# Altium PCB PCB_ws2812_controlBoard_2021-06-14.pcbdoc
Units mm, origin at the board's own origin, x right, y up, seen from the top; angles counter-clockwise.
Board outline 41 x 27 mm, 2 copper layers (Top Layer, Bottom Layer); 14 components, 17 nets, 61 pads, 7 vias.
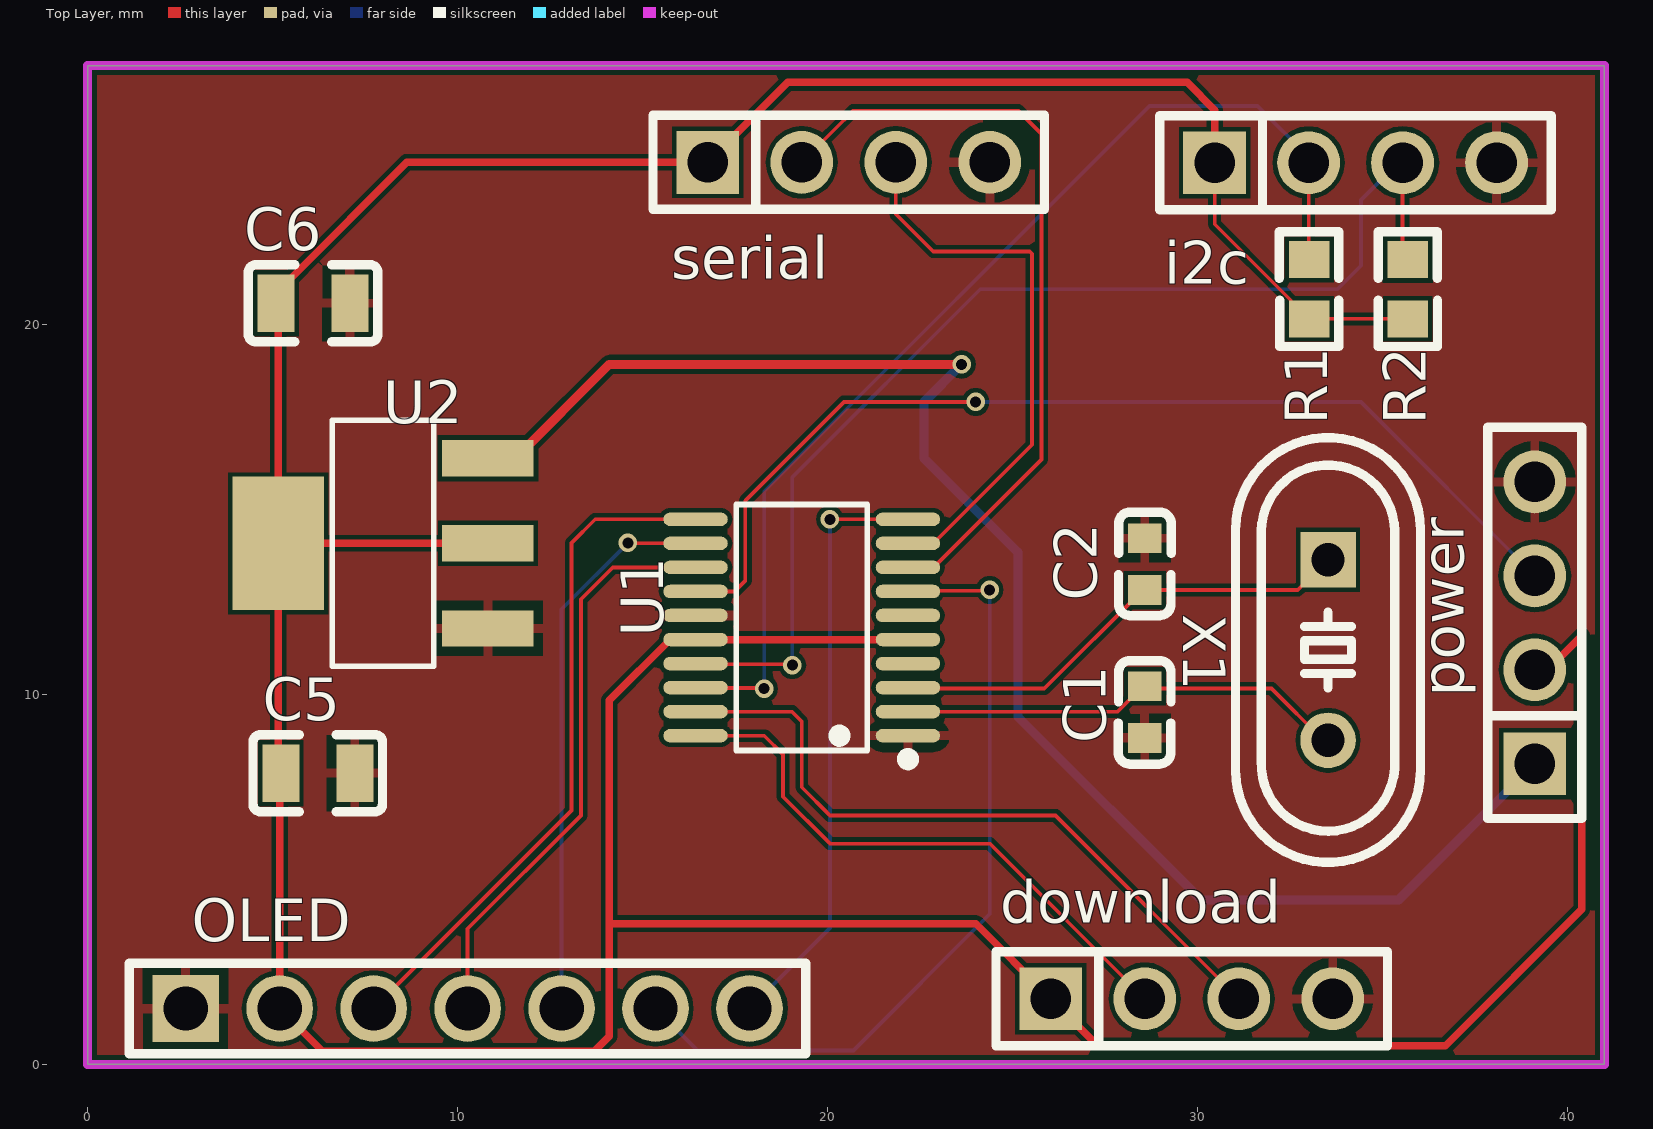
[diagram p0: Top Layer view]
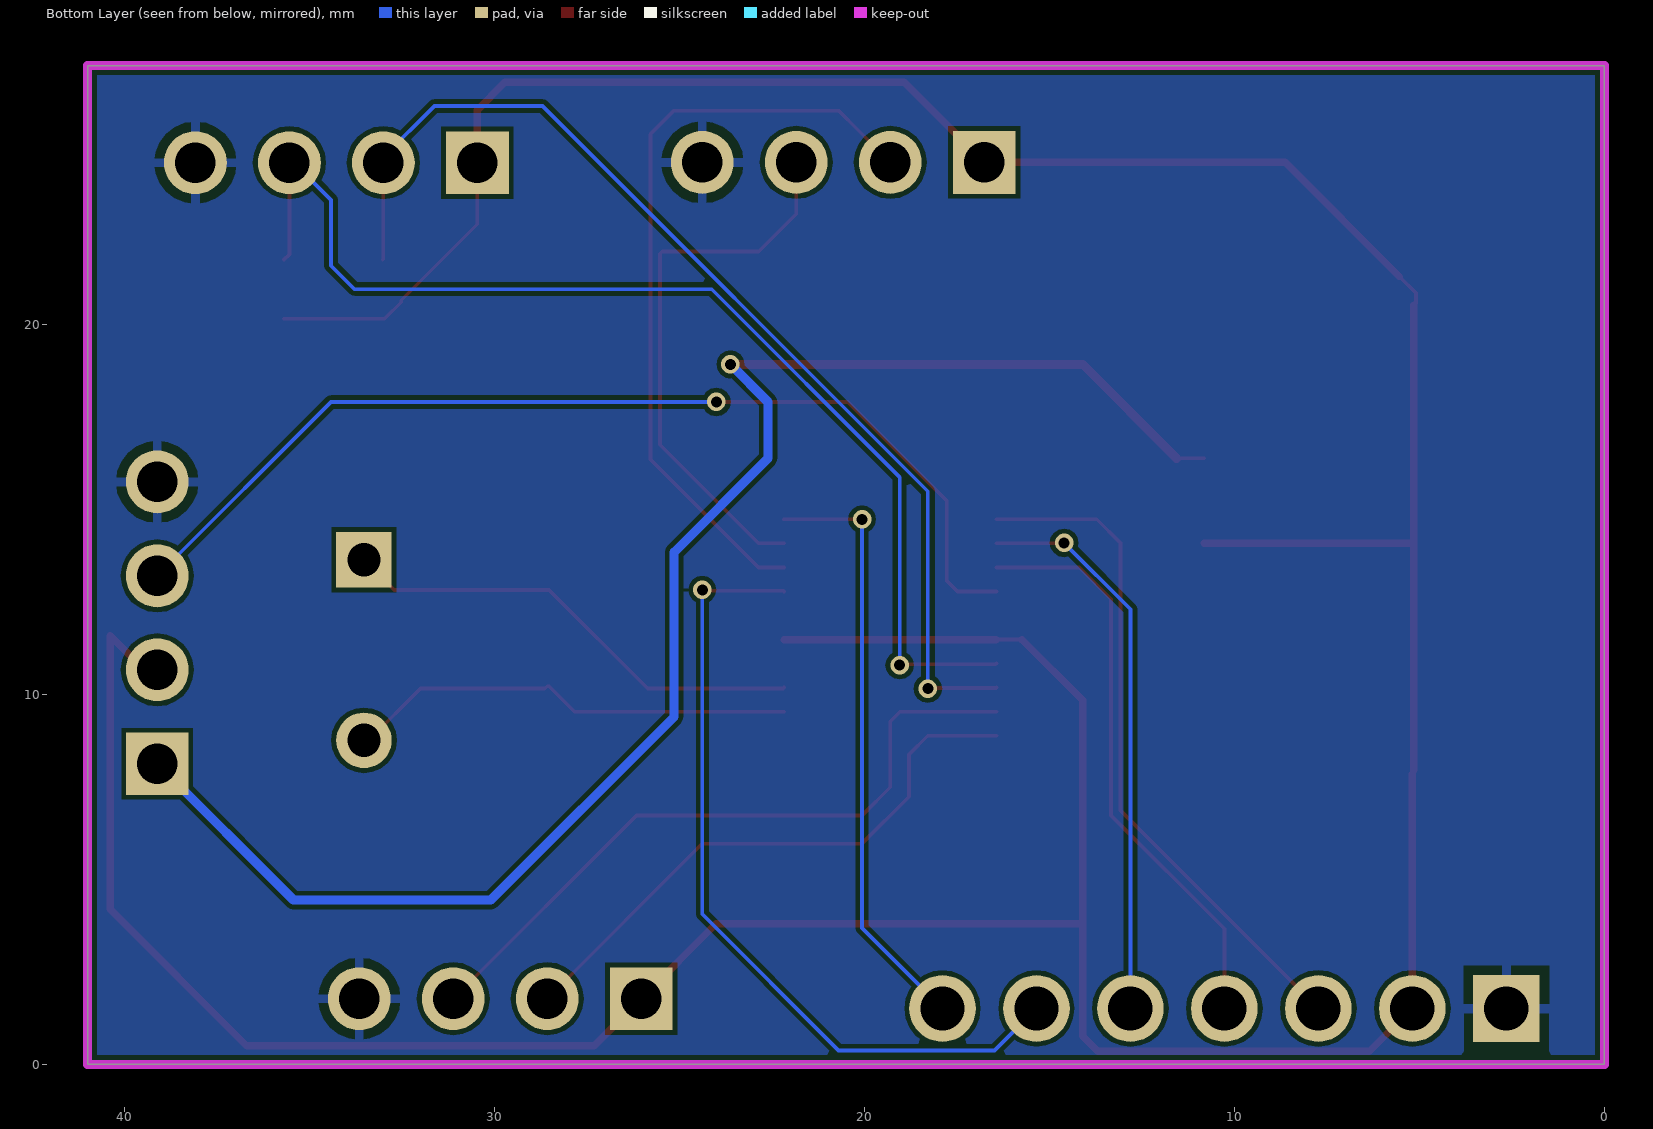
[diagram p1: Bottom Layer view, seen from below]

## Layer stack, top to bottom
Top Solder: solder mask 0.0102, Solder Resist, Dk 3.5
Top Layer: signal copper 0.0356
Dielectric1: dielectric 0.32, FR-4, Dk 4.8
Bottom Layer: signal copper 0.0356
Bottom Solder: solder mask 0.0102, Solder Resist, Dk 3.5

## Board outline
0,0 0,27 41,27 41,0

## Design rules (kind name [scope] priority, off if disabled: settings)
Clearance [All] p1: gap=0.127 ignorepadtopadclearanceinfootprint=FALSE
HoleSize [All] p1: absolutevalues=TRUE maxlimit=6.3 minlimit=0.2 maxpercent=80.000 minpercent=20.000
HoleToHoleClearance [All] p1: gap=0.127 allowstackedmicrovias=TRUE
MinimumSolderMaskSliver [All] p1: minsoldermaskwidth=0.127
PolygonConnect [All] p1: connectstyle=Relief reliefconductorwidth=0.254 reliefentries=4 polygonreliefangle="90 Angle" airgapwidth=0.254
RoutingVias [All] p1: holewidth=0.31 width=0.51 viastyle="Through Hole" minholewidth=0.3 minwidth=0.5 maxholewidth=0.4 maxwidth=0.6
SolderMaskExpansion [All] p1: expansion=0.102 istentingtop=FALSE
Width [All] p1: maxlimit=0.254 minlimit=0.089 preferedwidth=0.102
27 further rules are at their usual default settings.

## Components (designator, comment, footprint, x,y, rotation, side; value= is the part's Value field where it differs from the comment)
C1 "22pF" C0603 28.575,9.525 r90 top
C2 "22pF" C0603 28.575,13.524 r270 top
C5 "104" C0805 6.223,7.874 r0 top
C6 "104" C0805 6.096,20.574 r0 top
download "下载" HDR-TH_4P-P2.54-V-F 29.845,1.778 r0 top (schematic designator H1)
i2c "i2c" HDR-TH_4P-P2.54-V-F 34.275,24.374 r0 top (schematic designator H3)
OLED "OLED" HDR-TH_7P-P2.54-V 10.272,1.514 r0 top (schematic designator H4)
power "电源" HDR-TH_4P-P2.54-V-F 39.116,11.938 r90 top (schematic designator H5)
R1 "4.7k" R0603 33.02,20.955 r90 top
R2 "4.7k" R0603 35.687,20.955 r90 top
serial "串口" HDR-TH_4P-P2.54-V-F 20.574,24.384 r0 top (schematic designator H2)
U1 "STM32F070F6P6" TSSOP-20_L6.5-W4.4-P0.65-LS6.4-BL 19.304,11.811 r90 top
U2 "AMS1117-3.3V" SOT-223-4_L6.5-W3.5-P2.30-LS7.0-BR 7.986,14.087 r0 top
X1 "8MHz" HC-49US_L11.5-W4.5-P4.88 33.528,11.203 r270 top

## Footprints (in the part's own frame and the unit in brackets; to place one, negate y for a bottom-side part, rotate by r counter-clockwise, add the part's x,y. Pads: shape width x height; smd on the part's side, far side on the other; paste and mask are expansions set on the pad)
C0603 [mm]
  rect 0.8x0.9 smd: 1(-0.7,0) 2(0.7,0)
  silkscreen extent -1.41,-0.71 1.39,0.72
C0805 [mm]
  rect 1x1.55 smd: 1(-1,0) 2(1,0)
  silkscreen extent -1.75,-1.04 1.75,1.04
HC-49US_L11.5-W4.5-P4.88 [mm]
  rect 1.5x1.5 hole 0.9: 1(-2.44,0)
  round 1.5 hole 0.9: 2(2.44,0)
  silkscreen extent -5.74,-2.5 5.74,2.5
HDR-TH_4P-P2.54-V-F [mm]
  rect 1.7x1.7 hole 1.1: 1(-3.81,0)
  round 1.7 hole 1.1: 2(-1.27,0) 3(1.27,0) 4(3.81,0)
  silkscreen extent -5.29,-1.27 5.29,1.27
HDR-TH_7P-P2.54-V [mm]
  rect 1.8x1.8 hole 1.2: 1(-7.62,0)
  round 1.8 hole 1.2: 2(-5.08,0) 3(-2.54,0) 4(0,0) 5(2.54,0) 6(5.08,0) 7(7.62,0)
  silkscreen extent -9.14,-1.22 9.14,1.22
R0603 [mm]
  rect 1x1.1 smd: 1(-0.8,0) 2(0.8,0)
  silkscreen extent -1.55,-0.8 1.55,0.81
SOT-223-4_L6.5-W3.5-P2.30-LS7.0-BR [mm]
  rect 2.47x0.98 smd: 1(2.835,-2.3) 2(2.835,0) 3(2.835,2.3)
  rect 2.47x3.6 smd: 4(-2.835,0)
  silkscreen extent -1.37,-3.33 1.37,3.33
TSSOP-20_L6.5-W4.4-P0.65-LS6.4-BL [mm]
  oval 0.364x1.742 smd: 1(-2.925,-2.871) 2(-2.275,-2.871) 3(-1.625,-2.871) 4(-0.975,-2.871) 5(-0.325,-2.871) 6(0.325,-2.871) 7(0.975,-2.871) 8(1.625,-2.871) 9(2.275,-2.871) 10(2.925,-2.871) 11(2.925,2.871) 12(2.275,2.871) 13(1.625,2.871) 14(0.975,2.871) 15(0.325,2.871) 16(-0.325,2.871) 17(-0.975,2.871) 18(-1.625,2.871) 19(-2.275,2.871) 20(-2.925,2.871)
  silkscreen extent -3.71,-3.02 3.33,1.77

## Via types
v1: diameter 0.5/0.5 (per signal layer), hole 0.3, Top Layer to Bottom Layer, 6 vias
v2: diameter 0.5, hole 0.3, Top Layer to Bottom Layer, 1 vias

## Nets (pads, with @x,y where several pads share a name; then routed paths per layer and width w, separated by ;. In a path a pad name is that pad's centre, name@x,y a point inside that pad or via, vN(x,y) a via of type N, cw(c..) or ccw(c..) an arc to the next point about the centre after c; other vN are vias at no path point)
5V: power.1 U2.3 | length 42.4
  Top Layer w0.102: U2.3 U2.3@11.566,16.387
  Top Layer w0.25: U2.3@11.566,16.387 14.102,18.923 v1(23.622,18.923)
  Bottom Layer w0.25: v1(23.622,18.923) 22.606,17.907 22.606,16.383 25.146,13.843 25.146,9.398 30.099,4.445 35.433,4.445 power.1
DC: OLED.6 U1.7 | length 22
  Top Layer w0.102: U1.7 22.195,12.807 24.364,12.807 v1(24.384,12.827)
  Bottom Layer w0.102: OLED.6 16.485,0.381 20.701,0.381 24.384,4.064 v1(24.384,12.827)
GND: C1.1 C2.1 C5.2 C6.2 download.4 i2c.4 OLED.1 power.4 serial.4 U1.1 U1.15 U2.1
MOSI: OLED.4 U1.13 | length 15.8
  Top Layer w0.102: OLED.4 10.272,3.668 13.335,6.731 13.335,12.573 14.198,13.436 U1.13
NSS: OLED.7 U1.10 | length 16.2
  Top Layer w0.102: v2(20.066,14.732) 20.068,14.734 22.173,14.734 U1.10
  Bottom Layer w0.102: OLED.7 20.066,3.688 v2(20.066,14.732)
PWM_OUT: power.3 U1.14 | length 28.1
  Top Layer w0.102: U1.14 17.485,12.786 17.78,13.081 17.78,15.24 20.447,17.907 v1(24.003,17.907) ; power.3@38.989,13.208 power.3
  Bottom Layer w0.102: v1(24.003,17.907) 34.417,17.907 power.3
RES: OLED.5 U1.12 | length 15.2
  Top Layer w0.102: v1(14.605,14.097) 14.61,14.092 16.428,14.092 U1.12
  Bottom Layer w0.102: OLED.5 12.812,12.304 v1(14.605,14.097)
RX: serial.3 U1.9 | length 15.1
  Top Layer w0.102: serial.3 21.844,22.987 22.86,21.971 25.467,21.971 25.527,21.911 25.527,16.749 22.864,14.086 U1.9
SCK: OLED.3 U1.11 | length 18.4
  Top Layer w0.102: OLED.3 13.081,6.863 13.081,14.097 13.72,14.736 U1.11
SCL: i2c.3 R2.2 U1.17 | length 31.4
  Top Layer w0.102: U1.17 16.454,10.815 19.03,10.815 v1(19.05,10.795) ; i2c.3 35.545,21.897 R2.2
  Bottom Layer w0.102: v1(19.05,10.795) 19.05,15.875 24.13,20.955 33.782,20.955 34.417,21.59 34.417,23.368 35.423,24.374 i2c.3
SDA: i2c.2 R1.2 U1.18 | length 29.6
  Top Layer w0.102: U1.18 16.446,10.173 18.275,10.173 v1(18.288,10.16) ; i2c.2 33.005,21.77 R1.2
  Bottom Layer w0.102: v1(18.288,10.16) 18.288,15.494 28.702,25.908 31.623,25.908 33.005,24.526 i2c.2
SWCLK: download.2 U1.20 | length 15.8
  Top Layer w0.102: U1.20 18.292,8.886 18.796,8.382 18.796,7.239 20.066,5.969 24.384,5.969 download.2
SWDIO: download.3 U1.19 | length 18.9
  Top Layer w0.102: U1.19 19.039,9.536 19.304,9.271 19.304,7.493 20.066,6.731 26.162,6.731 download.3
TX: serial.2 U1.8 | length 20.9
  Top Layer w0.102: serial.2 20.155,25.235 20.701,25.781 25.146,25.781 25.781,25.146 25.781,16.353 22.864,13.436 U1.8
U1_2: C1.2 U1.2 X1.2 | length 12.2
  Top Layer w0.102: U1.2 27.836,9.536 28.525,10.225 C1.2 28.64,10.16 32.004,10.16 33.401,8.763 X1.2
U1_3: C2.2 U1.3 X1.1 | length 12.8
  Top Layer w0.102: U1.3 22.201,10.16 25.861,10.16 28.525,12.824 C2.2 32.709,12.824 X1.1
VCC: C5.1 C6.1 download.1 i2c.1 OLED.2 power.2 R1.1 R2.1 serial.1 U1.5 U1.16 U2.2 U2.4 | length 128.1
  Top Layer w0.102: C5.1@5.151,7.946 C5.1 C5.1@5.192,7.843 ; C6.1@5.151,20.519 C6.1 5.096,20.849 C6.1@5.545,21.298 ; U1.16@15.744,11.486 U1.16 ; i2c.1 30.465,22.71 32.521,20.654 32.521,20.604 32.97,20.155 R1.1 R2.1 ; power.2 power.2@39.466,10.668
  Top Layer w0.202: C5.1@5.151,7.946 U2.4 ; C6.1@5.151,20.519 U2.4 ; C5.1@5.192,7.843 OLED.2 6.351,0.355 13.69,0.355 14.097,0.762 14.097,3.81 ; C6.1@5.545,21.298 8.631,24.384 serial.1 18.923,26.543 29.718,26.543 30.465,25.796 i2c.1 ; U2.2 U2.4 ; U1.16@15.744,11.486 14.097,9.839 14.097,3.81 ; U1.16 U1.5 ; power.2@39.466,10.668 40.386,11.588 40.386,4.191 36.703,0.508 27.305,0.508 download.1 24.003,3.81 14.097,3.81
pads on no net: U1.4 U1.6

## Polygon pours and split planes (outlines as drawn)
GND on Top Layer "GND_L01_P000" (solid, pour order 0): 0,0 0,27 41,27 41,0
GND on Bottom Layer "GND_L02_P001" (solid, pour order 1): 0,0 0,27 41,27 41,0

## Keep-outs
Keep-Out Layer:
  the board outline again, w0.254